# Altium PCB DIO_RJ45_DIOT.PCBDOC (part 3 of 6)
Units mil, origin at the board's own origin, x right, y up, seen from the top; angles counter-clockwise.
Board outline 8758.72 x 3941.04 mil, 4 copper layers (TopLayer, MidLayer1, Internal Plane 1, BottomLayer), stack 46.562 mil thick; 318 components, 196 nets, 1276 pads, 687 vias.
Unrouted connection lines stored in the file: 2.
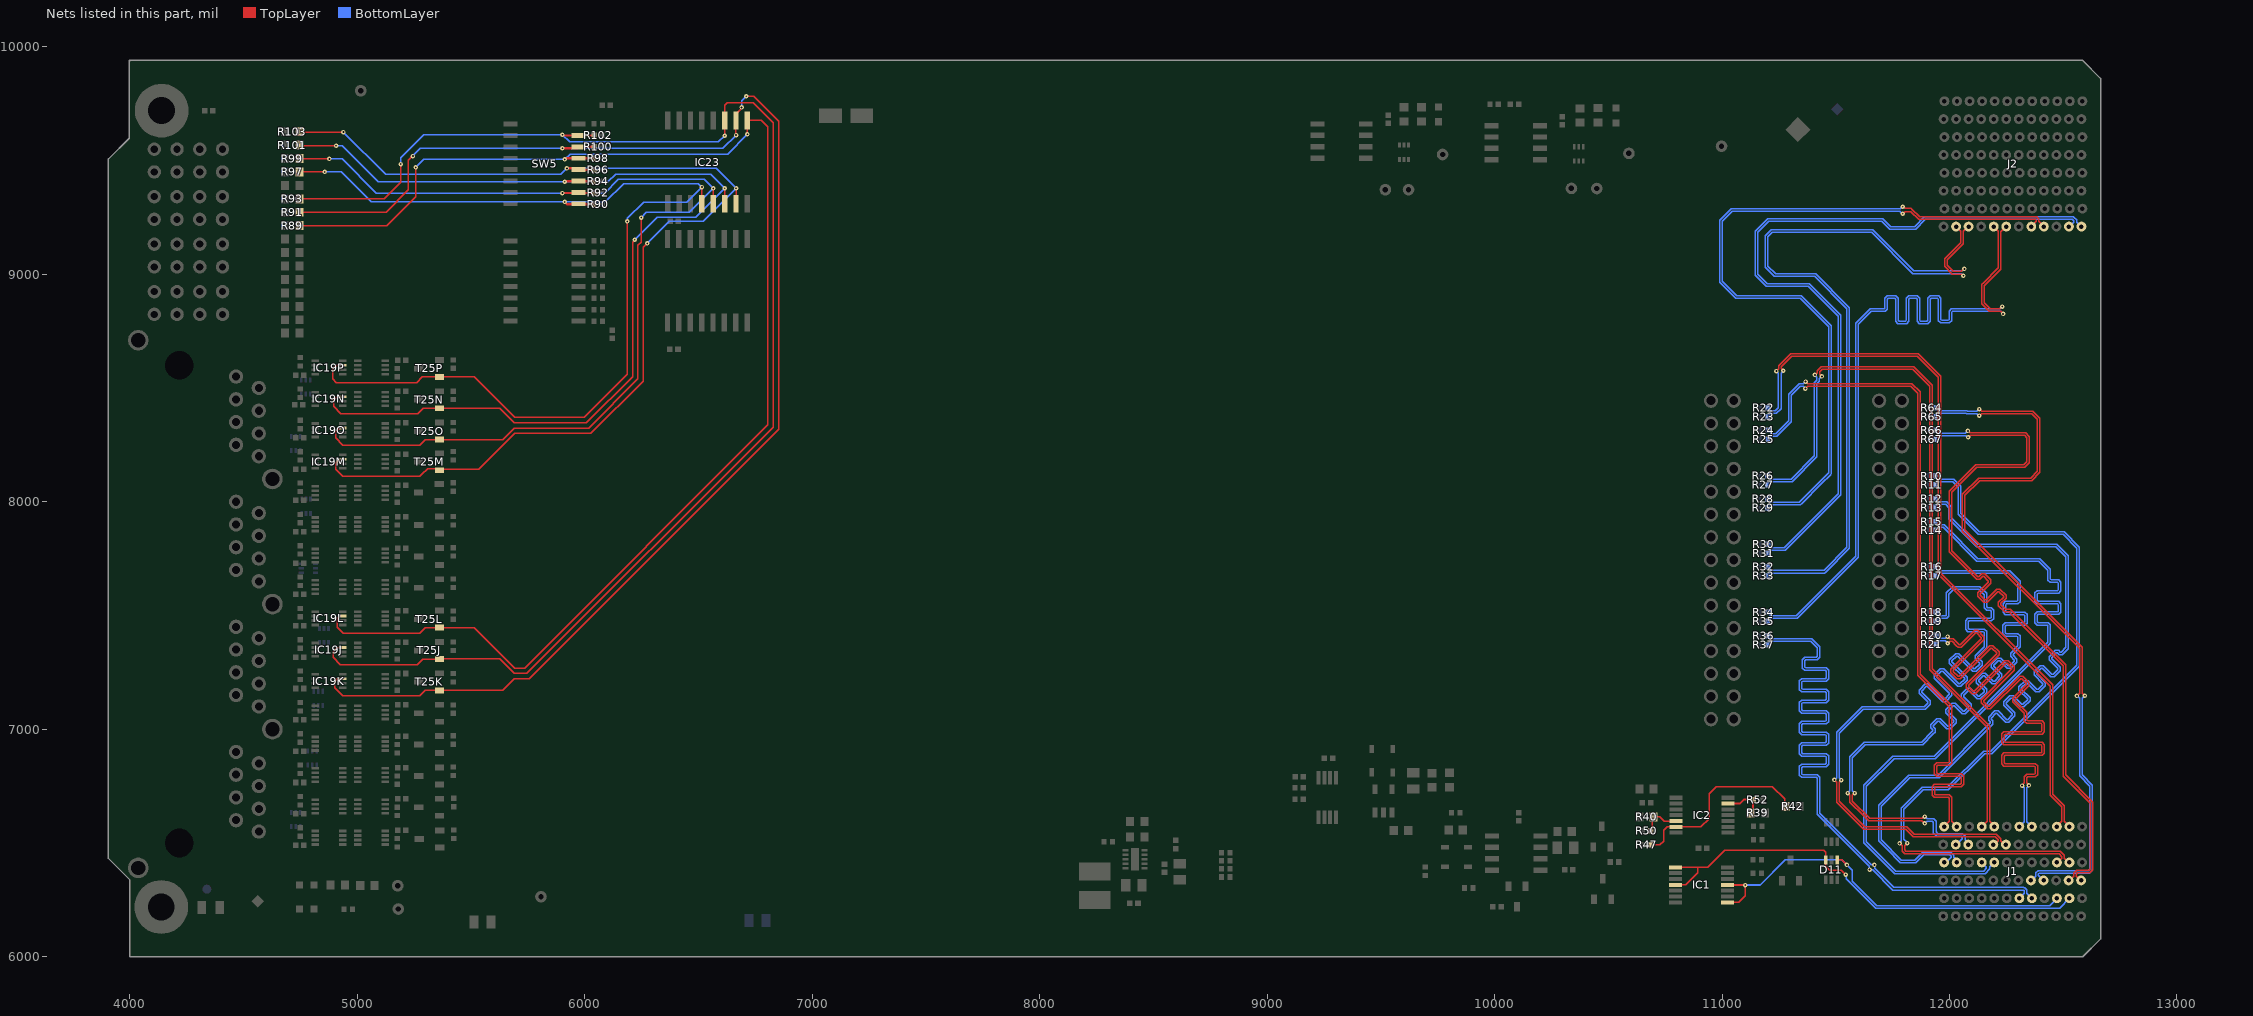
[diagram p4: the nets of this part, all layers, seen from the top]

## Via types
v1: diameter 19.68, hole 7.87, TopLayer to BottomLayer, tented both sides, 672 vias
v2: diameter 31.5, hole 19.68, TopLayer to BottomLayer, 10 vias
v3: diameter 23.62, hole 11.81, TopLayer to BottomLayer, tented both sides, 5 vias

## Nets (pads, with @x,y where several pads share a name; then routed paths per layer and width w, separated by ;. In a path a pad name is that pad's centre, name@x,y a point inside that pad or via, vN(x,y) a via of type N, cw(c..) or ccw(c..) an arc to the next point about the centre after c; other vN are vias at no path point) (continued)
BP_IO.BP_LVDS7_P: (continued)
  TopLayer w6: v1(11991.92,7406.27) 11992.71,7406.27 12002.28,7396.71 12016.35,7396.71 12038.22,7374.84 12042.62,7370.44 12047.71,7370.44 12110.53,7433.25 12124.73,7433.25 12151.54,7406.44 12151.54,7392.24 12017.2,7257.9 12017.2,7252.81 12037.56,7232.44 12042.65,7232.44 12176.99,7366.78 12191.2,7366.78 12218.01,7339.97 12218.01,7325.77 12083.67,7191.43 12083.67,7186.34 12104.03,7165.97 12109.12,7165.97 12243.46,7300.31 12257.66,7300.31 12284.47,7273.51 12284.47,7259.3 12150.13,7124.96 12150.13,7119.87 12170.5,7099.51 12175.59,7099.51 12308.16,7232.08 12322.36,7232.08 12349.17,7205.27 12349.17,7191.06 12288.13,7130.02 12288.13,7124.93 12335.47,7077.59 12340.16,7072.9 12340.16,7045.66 12340.16,7039.44 12343.76,7035.84 12407.05,7035.84 12417.09,7025.8 12417.09,6987.88 12407.05,6977.84 12244.13,6977.84 12240.53,6974.24 12240.53,6945.44 12244.13,6941.84 12407.05,6941.84 12417.09,6931.8 12417.09,6893.88 12407.05,6883.84 12244.13,6883.84 12240.53,6880.24 12240.53,6851.44 12244.13,6847.84 12376.99,6847.84 12387.03,6837.8 12387.03,6799.88 12376.99,6789.84 12343.76,6789.84 12340.16,6786.24 12340.16,6772.04 12340.16,6764.81 12349.34,6755.63 v1(12349.34,6752.33)
  BottomLayer w6: R20.1@11938.08,7415.47 11955.48,7398.06 11981.56,7398.06 11989.77,7406.27 v1(11991.92,7406.27) ; v1(12349.34,6752.33) 12349.34,6751.05 12340.26,6741.97 12340.26,6667.48 12340.65,6667.1 12340.65,6592.43 12358.6,6574.47 12362.2,6574.47 J1.E6@12362.2,6570.87
BP_IO.BP_LVDS8_N: J1.C6 R23.1 | length 3222.6
  TopLayer w6: v1(11269.24,8574.6) 11269.24,8575.56 11259.84,8584.96 11259.84,8591.85 11307.3,8639.31 11857.72,8639.31 11951,8546.03 11951,7681.17 12443.12,7189.05 12443.12,6708.08 12446.35,6704.85 12484.51,6666.68 12493.29,6657.9 12493.29,6595.13 12475.4,6577.23 12472.44,6577.23 J1.C6@12472.44,6570.87
  BottomLayer w6: R23.1@11201.43,8377.78 11204.44,8377.78 11209.42,8382.76 11209.42,8383.73 11212.94,8387.24 11238.91,8387.24 11260.07,8408.41 11260.07,8494.59 11260.34,8494.86 11260.34,8564.24 11269.24,8573.14 v1(11269.24,8574.6)
BP_IO.BP_LVDS8_P: J1.B6 R22.1 | length 3239.8
  TopLayer w6: v1(11239.45,8573.43) 11239.45,8574.39 11248.84,8583.79 11248.84,8596.41 11302.74,8650.31 11862.28,8650.31 11962,8550.59 11962,7685.73 12454.12,7193.6 12454.12,6712.63 12504.29,6662.46 12504.29,6594.13 J1.B6@12527.56,6570.87
  BottomLayer w6: R22.1@11201.35,8411.8 11209.42,8403.72 11209.42,8402.76 11212.94,8399.24 11233.94,8399.24 11248.07,8413.38 11248.07,8499.56 11248.34,8499.83 11248.34,8563.07 11239.45,8571.97 v1(11239.45,8573.43)
BP_IO.BP_LVDS9_N: J1.L6 R25.1 | length 3177.8
  TopLayer w6: v1@11368.92,8496.68 11368.92,8499.03 11376.95,8507.06 11603.38,8507.06 11829.46,8507.06 11859.52,8477 11859.52,7239.48 11860.06,7238.93 11860.06,7235.69 11866.51,7229.25 11998.51,7097.25 11998.51,6914 11998.51,6854.83 11994.91,6851.23 11943.23,6851.23 11933.18,6841.19 11933.18,6803.28 11943.23,6793.23 12047.39,6793.23 12050.99,6789.63 12050.99,6760.83 12047.39,6757.23 11933.28,6757.23 11923.24,6747.19 11923.24,6709.28 11933.28,6699.23 11994.91,6699.23 11998.51,6695.63 11998.51,6689.41 11998.51,6594 11976.38,6571.87 J1.L6@11976.38,6570.87
  BottomLayer w6: R25.1@11194.87,8278.22 11205.91,8278.22 11210.32,8282.62 11210.32,8283.88 11213.83,8287.39 11241.1,8287.39 11247.54,8293.84 11297.42,8343.72 11303.86,8350.16 11303.86,8466.34 11344.72,8507.2 11356.24,8507.2 11366.76,8496.68 v1@11368.92,8496.68
  other v1: 11366.59,8496.68
BP_IO.BP_LVDS9_P: J1.K6 R24.1 | length 3196.4
  TopLayer w6: v1(11367.33,8527.15) 11369.14,8527.15 11377.69,8518.6 11598.6,8518.6 11834.24,8518.6 11871.06,8481.78 11871.06,7240.25 12009.51,7101.8 12009.51,6914 12009.51,6850.28 11999.47,6840.23 11947.78,6840.23 11944.18,6836.63 11944.18,6807.83 11947.78,6804.23 12051.95,6804.23 12061.99,6794.19 12061.99,6756.28 12051.95,6746.23 11937.84,6746.23 11934.24,6742.63 11934.24,6713.83 11937.84,6710.23 11999.47,6710.23 12009.51,6700.19 12009.51,6689.41 12009.51,6594.3 12031.5,6572.31 J1.K6@12031.5,6570.87
  BottomLayer w6: R24.1@11194.56,8312.23 11202.65,8312.23 11211.3,8303.58 11211.3,8301.91 11214.82,8298.39 11236.54,8298.39 11292.86,8354.72 11292.86,8470.9 11340.16,8518.2 11356.97,8518.2 11365.92,8527.15 v1(11367.33,8527.15)
BP_IO.BP_LVDS10_N: J1.I6 R27.1 | length 3227
  TopLayer w6: v1(11438.97,8549.85) 11438.97,8551.39 11430.16,8560.2 11430.16,8571.65 11431.07,8572.55 11440.31,8581.79 11837.78,8581.79 11912.65,8506.92 11912.65,7260.67 12165.22,7008.09 12165.22,6695.31 12165.37,6695.17 12165.37,6594.5 J1.I6@12141.73,6570.87
  BottomLayer w6: R27.1@11199.59,8072.91 11209.01,8082.32 11209.01,8083.89 11212.52,8087.41 11308.75,8087.41 11417.38,8196.04 11417.38,8518.58 11427.43,8528.63 11427.43,8539.71 11437.57,8549.85 v1(11438.97,8549.85)
BP_IO.BP_LVDS10_P: J1.H6 R26.1 | length 3241.3
  TopLayer w6: v1(11408.24,8556.79) 11408.8,8556.79 11419.16,8567.15 11419.16,8576.2 11420.07,8577.11 11435.75,8592.79 11842.33,8592.79 11923.65,8511.48 11923.65,7265.23 12176.22,7012.65 12176.22,6699.87 12176.37,6699.73 12176.37,6594.3 12196.85,6573.81 J1.H6@12196.85,6570.87
  BottomLayer w6: R26.1@11200.59,8112.48 11200.59,8111.7 11213.88,8098.41 11304.2,8098.41 11406.38,8200.59 11406.38,8523.13 11416.43,8533.19 11416.43,8546.27 11408.24,8554.47 v1(11408.24,8556.79)
BP_IO.BP_LVDS11_N: J2.E1 R29.1 | length 3279.4
  TopLayer w6: v1(11794.63,9264.78) 11795.45,9264.78 11804.99,9274.31 11830.42,9274.31 11864.33,9240.4 12378.53,9240.4 12382.52,9236.41 12382.52,9231.44 J2.E1@12359.79,9208.72
  BottomLayer w6: R29.1@11200.02,7972.55 11212.4,7984.93 11343.7,7984.93 11350.15,7991.38 11436.01,8077.24 11477.18,8118.41 11480.4,8121.63 11480.4,8773.54 11473.96,8779.98 11349.41,8904.53 11063.98,8904.53 11000.98,8967.52 11000.98,9231.3 11045,9275.31 11781.96,9275.31 11790.92,9266.35 11790.92,9264.78 v1(11794.63,9264.78)
BP_IO.BP_LVDS11_P: J2.D1 R28.1 | length 3296.6
  TopLayer w6: v1(11794.5,9295.83) 11797.42,9295.83 11804.86,9288.39 11831.71,9288.39 11834.78,9285.31 11834.97,9285.31 11868.89,9251.4 12383.09,9251.4 12393.52,9240.97 12393.52,9232 12414.91,9210.6 J2.D1@12414.91,9208.72
  BottomLayer w6: R28.1@11201.01,8009.53 11214.6,7995.93 11339.15,7995.93 11469.4,8126.19 11469.4,8768.98 11344.85,8893.53 11059.42,8893.53 10989.98,8962.96 10989.98,9235.86 11040.44,9286.31 11782.98,9286.31 11790.8,9294.14 11790.8,9295.83 v1(11794.5,9295.83)
BP_IO.BP_LVDS12_N: J2.B1 R31.1 | length 3324.7
  BottomLayer w6: R31.1@11201.57,7766.73 11209.99,7775.15 11209.99,7782.22 11213.51,7785.74 11267.97,7785.74 11268.05,7785.66 11277.55,7785.66 11521.96,8030.07 11521.96,8813.98 11521.96,8818.59 11383.93,8956.62 11199.88,8956.62 11157.79,8998.71 11157.79,9183.38 11206.42,9232.01 11703.14,9232.01 11737.61,9197.54 11851.74,9197.54 11894.46,9240.26 12540.14,9240.26 12546.97,9233.43 12546.97,9228.46 12527.23,9208.72 J2.B1@12525.14,9208.72
BP_IO.BP_LVDS12_P: J2.A1 R30.1 | length 3337.2
  BottomLayer w6: R30.1@11207.7,7812.77 11209.99,7810.48 11209.99,7800.72 11213.51,7797.2 11272.72,7797.2 11272.8,7797.12 11510.83,8035.15 11510.83,8813.98 11379.32,8945.48 11195.27,8945.48 11146.65,8994.09 11146.65,9187.99 11201.81,9243.15 11206.42,9243.15 11703.14,9243.15 11707.75,9243.15 11714.28,9236.62 11742.22,9208.68 11847.13,9208.68 11889.85,9251.4 12544.98,9251.4 12548.01,9248.37 12548.25,9248.37 12558.44,9238.18 12558.44,9228.46 12578.17,9208.72 J2.A1@12580.26,9208.72
BP_IO.BP_LVDS13_N: J2.K1 R33.1 | length 3299
  TopLayer w6: J2.K1@12029.08,9208.72 12033.54,9208.72 12033.54,9204.26 12049.73,9188.07 12049.73,9138.28 11978.13,9066.69 11978.13,9034.49 12012.76,8999.87 12050.99,8999.87 12058.61,8992.25 v1(12061.35,8992.25)
  BottomLayer w6: R33.1@11201.9,7667.58 R33.1@11201.9,7673.49 11201.9,7674.28 11212.99,7685.36 11450.64,7685.36 11452,7686.73 11453.27,7686.73 11459.71,7693.17 11553.77,7787.23 11560.21,7793.67 11560.21,8852.19 11553.77,8858.63 11411.42,9000.98 11235.24,9000.98 11201.77,9034.45 11201.77,9164.37 11220.47,9183.07 11658.82,9183.07 11839.41,9002.48 12050.99,9002.48 12061.22,8992.25 v1(12061.35,8992.25)
BP_IO.BP_LVDS13_P: J2.J1 R32.1 | length 3290.1
  TopLayer w6: v1(12065.49,9022.4) 12061.78,9022.4 12050.85,9011.46 12017.56,9011.46 11989.72,9039.3 11989.72,9061.88 12061.32,9133.48 12061.32,9188.93 12081.11,9208.72 J2.J1@12084.2,9208.72
  BottomLayer w6: R32.1@11201.9,7718.77 11210.32,7710.35 11210.32,7703.07 11214.92,7698.46 11419.77,7698.46 11420.51,7697.73 11448.71,7697.73 11549.21,7798.23 11549.21,8847.63 11406.86,8989.98 11230.68,8989.98 11190.77,9029.89 11190.77,9168.93 11215.92,9194.07 11220.47,9194.07 11663.37,9194.07 11843.97,9013.48 12055.13,9013.48 12064.05,9022.4 v1(12065.49,9022.4)
BP_IO.BP_LVDS14_N: J2.H1 R35.1 | length 3309.8
  TopLayer w6: J2.H1@12194.44,9208.72 12214.86,9188.29 12214.86,9026.81 12148.77,8960.71 12142.32,8954.27 12142.32,8868.59 12175.37,8835.55 12190.15,8835.55 12225.26,8835.54 12235.62,8825.18 v1(12235.62,8824.85)
  BottomLayer w6: R35.1@11202.24,7465.89 11202.24,7475.73 11209.48,7482.97 11209.64,7482.97 11213.7,7487.03 11329.87,7487.03 11598.6,7755.76 11598.6,8778.33 11655.81,8835.54 11706.69,8835.54 11717.47,8835.54 11727.52,8845.58 11727.52,8890.02 11731.12,8893.62 11759.92,8893.62 11763.52,8890.02 11763.52,8791.48 11773.56,8781.44 11811.47,8781.44 11821.52,8791.48 11821.52,8890.02 11825.12,8893.62 11853.92,8893.62 11857.52,8890.02 11857.52,8791.48 11867.56,8781.44 11905.47,8781.44 11915.52,8791.48 11915.52,8890.02 11919.12,8893.62 11947.92,8893.62 11951.52,8890.02 11951.52,8795.34 11961.56,8785.29 11999.47,8785.29 12009.52,8795.34 12009.52,8831.94 12013.12,8835.54 12136.81,8835.54 12225.26,8835.54 12235.62,8825.18 v1(12235.62,8824.85)
BP_IO.BP_LVDS14_P: J2.G1 R34.1 | length 3286.4
  TopLayer w6: v1(12231.58,8857.22) 12231.58,8856.89 12221.22,8846.54 12194.72,8846.54 12179.92,8846.55 12153.32,8873.15 12153.32,8949.71 12225.86,9022.25 12225.86,9185.03 J2.G1@12249.55,9208.72
  BottomLayer w6: R34.1@11200.08,7520.29 11209.48,7510.89 11209.48,7502.93 11214.38,7498.03 11325.32,7498.03 11587.6,7760.31 11587.6,8782.88 11651.25,8846.54 11706.69,8846.54 11712.92,8846.54 11716.52,8850.14 11716.52,8894.58 11726.56,8904.62 11764.47,8904.62 11774.52,8894.58 11774.52,8796.04 11778.12,8792.44 11806.92,8792.44 11810.52,8796.04 11810.52,8894.58 11820.56,8904.62 11858.47,8904.62 11868.52,8894.58 11868.52,8796.04 11872.12,8792.44 11900.92,8792.44 11904.52,8796.04 11904.52,8894.58 11914.56,8904.62 11952.47,8904.62 11962.52,8894.58 11962.52,8799.89 11966.12,8796.29 11994.92,8796.29 11998.52,8799.89 11998.52,8836.49 12008.56,8846.54 12136.81,8846.54 12221.22,8846.54 12231.58,8856.89 v1(12231.58,8857.22)
BP_IO.BP_LVDS15_N: J1.F2 R37.1 | length 3287.1
  BottomLayer w6: R37.1@11201.06,7371.06 11201.06,7371.85 11209.48,7380.27 11210.27,7380.27 11215.57,7385.56 11391.01,7385.56 11407.38,7369.2 11418.41,7358.17 11418.41,7318.98 11414.81,7315.38 11363.34,7315.38 11353.29,7305.34 11353.29,7267.43 11363.34,7257.38 11454.72,7257.38 11458.32,7253.78 11458.32,7224.98 11454.72,7221.38 11349.98,7221.38 11339.93,7211.34 11339.93,7173.43 11349.98,7163.38 11454.72,7163.38 11458.32,7159.78 11458.32,7130.98 11454.72,7127.38 11349.98,7127.38 11339.93,7117.34 11339.93,7079.43 11349.98,7069.38 11454.72,7069.38 11458.32,7065.78 11458.32,7036.98 11454.72,7033.38 11349.98,7033.38 11339.93,7023.34 11339.93,6985.43 11349.98,6975.38 11454.72,6975.38 11458.32,6971.78 11458.32,6942.98 11454.72,6939.38 11349.98,6939.38 11339.93,6929.34 11339.93,6891.43 11349.98,6881.38 11454.72,6881.38 11458.32,6877.78 11458.32,6848.98 11454.72,6845.38 11349.98,6845.38 11339.93,6835.34 11339.93,6797.43 11349.98,6787.38 11414.81,6787.38 11418.41,6783.78 11418.41,6777.56 11418.41,6625.81 11424.85,6619.37 11648.07,6396.15 11648.07,6382.3 11650.61,6379.76 11651.53,6380.68 11662.12,6380.68 11750.69,6292.11 12325.56,6292.11 12329.34,6288.32 12329.34,6277.83 12307.42,6255.91 J1.F2@12307.09,6255.91
  other v1: 11648.47,6381.9
BP_IO.BP_LVDS15_P: J1.E2 R36.1 | length 3302.5
  BottomLayer w6: R36.1@11201.06,7409.88 11201.06,7409.09 11209.48,7400.68 11210.27,7400.68 11214.38,7396.56 11395.57,7396.56 11422.93,7369.2 11429.41,7362.72 11429.41,7314.43 11419.37,7304.38 11367.89,7304.38 11364.29,7300.78 11364.29,7271.98 11367.89,7268.38 11459.27,7268.38 11469.32,7258.34 11469.32,7220.43 11459.27,7210.38 11354.53,7210.38 11350.93,7206.78 11350.93,7177.98 11354.53,7174.38 11459.27,7174.38 11469.32,7164.34 11469.32,7126.43 11459.27,7116.38 11354.53,7116.38 11350.93,7112.78 11350.93,7083.98 11354.53,7080.38 11459.27,7080.38 11469.32,7070.34 11469.32,7032.43 11459.27,7022.38 11354.53,7022.38 11350.93,7018.78 11350.93,6989.98 11354.53,6986.38 11459.27,6986.38 11469.32,6976.34 11469.32,6938.43 11459.27,6928.38 11354.53,6928.38 11350.93,6924.78 11350.93,6895.98 11354.53,6892.38 11459.27,6892.38 11469.32,6882.34 11469.32,6844.43 11459.27,6834.38 11354.53,6834.38 11350.93,6830.78 11350.93,6801.98 11354.53,6798.38 11419.37,6798.38 11429.41,6788.34 11429.41,6777.56 11429.41,6630.37 11656.54,6403.24 v1@11669.32,6403.24 ; v1(11670.25,6402.31) 11670.76,6401.81 11670.76,6388.16 11755.41,6303.51 12325.56,6303.51 12325.75,6303.31 12329.91,6303.31 12340.34,6292.88 12340.34,6277.43 12361.87,6255.91 J1.E2@12362.2,6255.91
DIR_CTRL0: IC19P.3 IC23.4 R90.1 R97.2 SW5.1 T25P.1 | length 4687.4
  TopLayer w6: R97.2@4746.06,9448.82 v1(4857.28,9448.82) ; IC19P.3@4937.15,8599.41 4909.52,8599.41 4893.17,8583.07 4893.17,8538.91 4908.89,8523.2 5261.8,8523.2 5287.18,8548.57 T25P.1@5350.1,8548.57 ; T25P.1@5362.05,8547.98 5514.03,8547.98 5691.93,8370.08 5998.21,8370.08 6187.01,8558.88 v1(6187.01,9231.3) ; IC23.4@6515.35,9309.05 6515.85,9309.55 v1(6515.85,9382.38)
  TopLayer w10: v1(5912.4,9316.93) 5922.24,9307.09 R90.1@6041.53,9307.09
  BottomLayer w6: v1(4857.28,9448.82) 4931.1,9448.82 5062.99,9316.93 v1(5912.4,9316.93) 6090.55,9316.93 6171.26,9397.64 6500.59,9397.64 v1(6515.85,9382.38) 6449.41,9315.94 6259.84,9315.94 6188.43,9244.53 6188.43,9232.72 v1(6187.01,9231.3)
DIR_CTRL1: IC19O.3 IC23.5 R92.1 R99.2 SW5.2 T25O.1 | length 4744.8
  TopLayer w6: R99.2@4753.94,9507.87 4755.91,9505.91 v1(4877.95,9505.91) ; IC19O.3@4937.15,8323.22 4921.47,8323.22 4905.13,8306.88 4905.13,8280.51 4937.1,8248.54 5275.28,8248.54 5299.13,8272.39 T25O.1@5362.05,8272.39 5639.51,8272.39 5689.96,8322.83 6017.77,8322.83 6234.25,8539.31 6234.25,9125.98 6249.02,9140.75 v1(6249.02,9248.03) ; IC23.5@6565.35,9309.05 6565.85,9309.55 v1(6565.85,9376.48)
  TopLayer w10: R99.2@4746.06,9507.87 R99.2@4753.94,9507.87 ; v1(5902.56,9356.3) 6040.13,9356.3 R92.1@6041.53,9357.7
  BottomLayer w6: v1(4877.95,9505.91) 4934.06,9505.91 5083.66,9356.3 v1(5902.56,9356.3) 6087.6,9356.3 6148.62,9417.32 6525,9417.32 v1(6565.85,9376.48) 6460.04,9270.67 6271.65,9270.67 v1(6249.02,9248.03)
DIR_CTRL2: IC19N.3 IC23.6 R94.1 R101.2 SW5.3 T25N.1 | length 4790
  TopLayer w6: R101.2@4746.06,9566.93 4749.02,9563.98 v1(4907.48,9563.98) ; IC19N.3@4937.15,8461.61 4913.45,8461.61 4897.11,8445.27 4897.11,8418.9 4929.08,8386.93 5267.27,8386.93 5291.12,8410.78 T25N.1@5362.05,8410.78 ; T25N.1@5362.05,8410.18 5627.22,8410.18 5690.94,8346.46 6007.99,8346.46 6210.63,8549.1 6210.63,9140.75 v1(6220.47,9150.59) ; IC23.6@6615.35,9309.05 6615.85,9309.55 v1(6615.85,9377.46)
  TopLayer w10: v1(5912.4,9405.51) 5915.21,9408.33 R94.1@6041.53,9408.33
  BottomLayer w6: v1(4907.48,9563.98) 4934.06,9563.98 5092.52,9405.51 v1(5912.4,9405.51) 6102.36,9405.51 6135.83,9438.98 6554.33,9438.98 v1(6615.85,9377.46) 6488.39,9250 6319.88,9250 v1(6220.47,9150.59)
DIR_CTRL3: IC19M.3 IC23.7 R96.1 R103.2 SW5.4 T25M.1 | length 4936.9
  TopLayer w6: R103.2@4746.06,9625.98 4748.03,9624.02 v1(4939.96,9624.02) ; IC19M.3@4937.15,8185.43 4921.47,8185.43 4905.13,8169.08 4905.13,8142.71 4937.1,8110.74 5275.28,8110.74 5284.54,8120 5309.72,8145.18 T25M.1@5360.24,8145.18 ; T25M.1@5360.24,8141.73 5534.45,8141.73 5691.93,8299.21 6027.56,8299.21 6257.87,8529.53 6257.87,9117.13 v1(6275.59,9134.84) ; IC23.7@6665.35,9309.05 6665.85,9309.55 v1(6665.85,9377.46)
  TopLayer w10: v1(5922.24,9464.57) SW5.4@5968.11,9464.57 ; SW5.4@5973.42,9459.25 5973.73,9458.94 R96.1@6041.53,9458.94
  BottomLayer w6: v1(4939.96,9624.02) 5125.98,9437.99 5895.67,9437.99 v1(5922.24,9464.57) 6578.74,9464.57 v1(6665.85,9377.46) 6520.67,9232.28 6373.03,9232.28 v1(6275.59,9134.84)
DIR_CTRL4: IC19L.3 IC23.9 R89.2 R98.1 SW5.5 T25L.1 | length 6314
  TopLayer w6: R89.2@4746.06,9212.6 5129.92,9212.6 5257.87,9340.55 v1(5257.87,9468.5) ; IC19L.3@4937.15,7496.45 4921.47,7496.45 4912.42,7487.4 4912.42,7447.86 4938.51,7421.76 5275.28,7421.76 5299.13,7445.61 T25L.1@5362.05,7445.61 5514.03,7445.61 5691.93,7267.72 5736.39,7267.72 6806.1,8337.42 6806.1,9578.74 6806.1,9646.65 6777.56,9675.2 IC23.9@6715.35,9675.2 v1@6715.35,9614.17
  TopLayer w10: v1(5912.4,9503.94) 5917.72,9509.25 SW5.5@5973.42,9509.25 6041.23,9509.25 R98.1@6041.53,9509.56
  BottomLayer w6: v1(5257.87,9468.5) 5293.31,9503.94 v1(5912.4,9503.94) 5936.02,9527.56 6628.74,9527.56 v1@6715.35,9614.17
  other v1: 6715.85,9614.67
DIR_CTRL5: IC19K.3 IC23.10 R91.2 R100.1 SW5.6 T25K.1 | length 6522.1
  TopLayer w6: R91.2@4746.06,9271.65 5126.97,9271.65 5225.39,9370.08 5225.39,9501.2 5242.9,9518.7 v1(5245.08,9518.7) ; IC19K.3@4937.15,7220.86 4912.79,7220.86 4902.27,7210.34 4902.27,7181 4937.1,7146.17 5275.28,7146.17 5299.13,7170.02 T25K.1@5362.05,7170.02 5639.51,7170.02 5689.96,7220.47 5755.96,7220.47 6853.35,8317.86 6853.35,9671.26 6743.11,9781.5 v1(6710.63,9781.5) ; v1@6665.35,9610.24 6665.35,9702.76 6687.34,9724.74 6687.34,9729.67 v1(6689.96,9732.28)
  TopLayer w10: v1(5902.56,9553.15) SW5.6@5967.32,9553.15 ; SW5.6@5973.42,9559.25 5974.35,9560.18 R100.1@6041.53,9560.18
  BottomLayer w6: v1(5245.08,9518.7) 5245.08,9519.68 5278.05,9552.66 5902.07,9552.66 v1(5902.56,9553.15) 6608.27,9553.15 v1(6665.85,9610.73) ; v1(6689.96,9732.28) 6689.96,9760.83 6696.85,9767.72 v1(6710.63,9781.5)
DIR_CTRL6: IC19J.3 IC23.11 R93.2 R102.1 SW5.7 T25J.1 | length 6431.4
  TopLayer w6: R93.2@4746.06,9330.71 5119.09,9330.71 5191.93,9403.54 v1(5191.93,9483.41) ; IC19J.3@4926.18,7358.27 4910.5,7358.27 4894.16,7341.93 4894.16,7315.56 4926.13,7283.58 5264.32,7283.58 5288.17,7307.43 T25J.1@5351.08,7307.43 ; T25J.1@5362.05,7307.82 5627.22,7307.82 5690.94,7244.09 5746.18,7244.09 6829.72,8327.64 6829.72,9665.35 6741.14,9753.94 6626.97,9753.94 6616.14,9743.11 IC23.11@6616.14,9674.41 ; IC23.11@6615.35,9675.2 IC23.11@6616.14,9674.41 ; v1(6616.14,9608.27) IC23.11@6616.14,9674.41
  TopLayer w10: v1(5902.56,9612.2) 5905.51,9609.25 SW5.7@5973.42,9609.25 6039.99,9609.25 R102.1@6041.53,9610.8
  BottomLayer w6: v1(5191.93,9483.41) 5191.93,9510.83 5293.31,9612.2 v1(5902.56,9612.2) 5934.06,9580.71 6588.58,9580.71 v1(6616.14,9608.27)

## Text inside footprints (layer, text, board x,y; h text height)
J2: TopOverlay "7" at 11794.83,9667.38 h39.37 r90; TopOverlay "8" at 11794.83,9746.12 h39.37 r90; TopOverlay "6" at 11794.83,9588.64 h39.37 r90; TopOverlay "5" at 11794.83,9509.9 h39.37 r90; TopOverlay "4" at 11794.83,9431.16 h39.37 r90; TopOverlay "3" at 11794.83,9352.42 h39.37 r90; TopOverlay "2" at 11794.83,9273.68 h39.37 r90; TopOverlay "1" at 11794.83,9194.94 h39.37 r90; TopOverlay "L" at 11993.65,9122.1 h39.37 r90; TopOverlay "K" at 12048.77,9122.1 h39.37 r90; TopOverlay "J" at 12103.89,9122.1 h39.37 r90; TopOverlay "I" at 12159,9131.95 h39.37 r90; TopOverlay "H" at 12214.12,9122.1 h39.37 r90; TopOverlay "G" at 12269.24,9122.1 h39.37 r90; TopOverlay "F" at 12324.36,9122.1 h39.37 r90; TopOverlay "E" at 12379.48,9122.1 h39.37 r90; TopOverlay "D" at 12434.59,9122.1 h39.37 r90; TopOverlay "C" at 12489.71,9082.73 h39.37 r90; TopOverlay "B" at 12544.83,9082.73 h39.37 r90; TopOverlay "A" at 12599.95,9082.73 h39.37 r90; DrillDrawing "Diam. 0.5mm +/-0.05" at 12609.79,9917.38 h39.37 r180; DrillDrawing "PRESS-FIT TECHNOLOGY" at 12609.79,9858.33 h39.37 r180; Mechanical14 "7" at 11794.83,9667.38 h39.37 r90; Mechanical14 "8" at 11794.83,9746.12 h39.37 r90; Mechanical14 "6" at 11794.83,9588.64 h39.37 r90; Mechanical14 "5" at 11794.83,9509.9 h39.37 r90; Mechanical14 "4" at 11794.83,9431.16 h39.37 r90; Mechanical14 "3" at 11794.83,9352.42 h39.37 r90; Mechanical14 "2" at 11794.83,9273.68 h39.37 r90; Mechanical14 "1" at 11794.83,9194.94 h39.37 r90; Mechanical14 "L" at 11993.65,9122.1 h39.37 r90; Mechanical14 "K" at 12048.77,9122.1 h39.37 r90; Mechanical14 "J" at 12103.89,9122.1 h39.37 r90; Mechanical14 "I" at 12159,9131.95 h39.37 r90; Mechanical14 "H" at 12214.12,9122.1 h39.37 r90; Mechanical14 "G" at 12269.24,9122.1 h39.37 r90; Mechanical14 "F" at 12324.36,9122.1 h39.37 r90; Mechanical14 "E" at 12379.48,9122.1 h39.37 r90; Mechanical14 "D" at 12434.59,9122.1 h39.37 r90; Mechanical14 "C" at 12489.71,9082.73 h39.37 r90; Mechanical14 "B" at 12544.83,9082.73 h39.37 r90; Mechanical14 "A" at 12599.95,9082.73 h39.37 r90; Mechanical8 "Edge of Daugher Card" at 12692.47,9357.34 h19.68 r90; Mechanical8 "Top Surface of Mother Board" at 13145.22,9312.07 h19.68 r90
J14: TopOverlay "30" at 11845.65,7068.37 h40 r270; Mechanical14 "30" at 11845.65,7068.37 h40 r270
J24: TopOverlay "30" at 11106.68,7068.33 h40 r270; Mechanical14 "30" at 11106.68,7068.33 h40 r270
LD1: TopOverlay "C" at 4457.87,9225.35 h39.37; TopOverlay "A" at 4457.87,9325.35 h39.37; TopOverlay "A" at 4077.13,9277.32 h39.37 r90; TopOverlay "B" at 4177.13,9277.32 h39.37 r90; TopOverlay "C" at 4277.13,9277.32 h39.37 r90; TopOverlay "D" at 4377.13,9277.32 h39.37 r90; Mechanical14 "A" at 4457.87,9325.35 h39.37; Mechanical14 "C" at 4457.87,9225.35 h39.37; Mechanical14 "A" at 4077.13,9277.32 h39.37 r90; Mechanical14 "B" at 4177.13,9277.32 h39.37 r90; Mechanical14 "C" at 4277.13,9277.32 h39.37 r90; Mechanical14 "D" at 4377.13,9277.32 h39.37 r90
LD2: TopOverlay "C" at 4458.27,9433.82 h39.37; TopOverlay "A" at 4458.27,9533.82 h39.37; TopOverlay "A" at 4077.52,9485.79 h39.37 r90; TopOverlay "B" at 4177.52,9485.79 h39.37 r90; TopOverlay "C" at 4277.52,9485.79 h39.37 r90; TopOverlay "D" at 4377.52,9485.79 h39.37 r90; Mechanical14 "A" at 4458.27,9533.82 h39.37; Mechanical14 "C" at 4458.27,9433.82 h39.37; Mechanical14 "A" at 4077.52,9485.79 h39.37 r90; Mechanical14 "B" at 4177.52,9485.79 h39.37 r90; Mechanical14 "C" at 4277.52,9485.79 h39.37 r90; Mechanical14 "D" at 4377.52,9485.79 h39.37 r90
LD3: TopOverlay "D" at 4377.59,8859.74 h39.37 r90; TopOverlay "C" at 4277.59,8859.74 h39.37 r90; TopOverlay "B" at 4177.59,8859.74 h39.37 r90; TopOverlay "A" at 4077.59,8859.74 h39.37 r90; TopOverlay "A" at 4458.34,8907.77 h39.37; TopOverlay "C" at 4458.34,8807.77 h39.37; Mechanical14 "D" at 4377.59,8859.74 h39.37 r90; Mechanical14 "C" at 4277.59,8859.74 h39.37 r90; Mechanical14 "B" at 4177.59,8859.74 h39.37 r90; Mechanical14 "A" at 4077.59,8859.74 h39.37 r90; Mechanical14 "C" at 4458.34,8807.77 h39.37; Mechanical14 "A" at 4458.34,8907.77 h39.37
LD4: TopOverlay "D" at 4377.52,9068.46 h39.37 r90; TopOverlay "C" at 4277.52,9068.46 h39.37 r90; TopOverlay "B" at 4177.52,9068.46 h39.37 r90; TopOverlay "A" at 4077.52,9068.46 h39.37 r90; TopOverlay "A" at 4458.27,9116.5 h39.37; TopOverlay "C" at 4458.27,9016.5 h39.37; Mechanical14 "D" at 4377.52,9068.46 h39.37 r90; Mechanical14 "C" at 4277.52,9068.46 h39.37 r90; Mechanical14 "B" at 4177.52,9068.46 h39.37 r90; Mechanical14 "A" at 4077.52,9068.46 h39.37 r90; Mechanical14 "C" at 4458.27,9016.5 h39.37; Mechanical14 "A" at 4458.27,9116.5 h39.37
SW5: TopOverlay "1" at 6131.82,9292.87 h35; TopOverlay "2" at 6116.82,9343.07 h35; TopOverlay "ON" at 5751.97,9729.33 h39.37 r90; TopOverlay "3" at 6116.82,9390.31 h35; TopOverlay "4" at 6115.16,9440.51 h35; TopOverlay "5" at 6116.82,9488.74 h35; TopOverlay "6" at 6118.49,9536.97 h35; TopOverlay "7" at 6116.82,9584.21 h35; TopOverlay "8" at 6116.82,9636.38 h35; Mechanical14 "1" at 5913.43,9299.25 h39.37 r90; Mechanical14 "2" at 5913.43,9349.25 h39.37 r90; Mechanical14 "ON" at 5773.43,9284.25 h39.37 r90; Mechanical14 "3" at 5913.43,9399.25 h39.37 r90; Mechanical14 "4" at 5913.43,9449.25 h39.37 r90; Mechanical14 "5" at 5913.43,9499.25 h39.37 r90; Mechanical14 "6" at 5913.43,9549.25 h39.37 r90; Mechanical14 "7" at 5913.43,9599.25 h39.37 r90; Mechanical14 "8" at 5913.43,9649.25 h39.37 r90
SW6: TopOverlay "4" at 6115.16,8928.15 h35; TopOverlay "1" at 6131.82,8784.45 h35; TopOverlay "2" at 6116.82,8833.66 h35; TopOverlay "ON" at 5775.59,8661.42 h39.37 r90; TopOverlay "3" at 6116.82,8880.91 h35; TopOverlay "5" at 6116.82,8976.38 h35; TopOverlay "6" at 6118.49,9029.53 h35; TopOverlay "7" at 6116.82,9076.77 h35; TopOverlay "8" at 6116.82,9126.97 h35; Mechanical14 "1" at 5913.43,8784.49 h39.37 r90; Mechanical14 "2" at 5913.43,8834.49 h39.37 r90; Mechanical14 "ON" at 5773.43,8769.49 h39.37 r90; Mechanical14 "3" at 5913.43,8884.49 h39.37 r90; Mechanical14 "4" at 5913.43,8934.49 h39.37 r90; Mechanical14 "5" at 5913.43,8984.49 h39.37 r90; Mechanical14 "6" at 5913.43,9034.49 h39.37 r90; Mechanical14 "7" at 5913.43,9084.49 h39.37 r90; Mechanical14 "8" at 5913.43,9134.49 h39.37 r90